# Altium PCB bookmarker.PcbDoc (part 1 of 3)
Units mil, origin at the board's own origin, x right, y up, seen from the top; angles counter-clockwise.
Board outline 5902.76 x 1187.28 mil, 2 copper layers (Top Layer, Bottom Layer); 9 components, 4 nets, 34 pads, 30 vias.
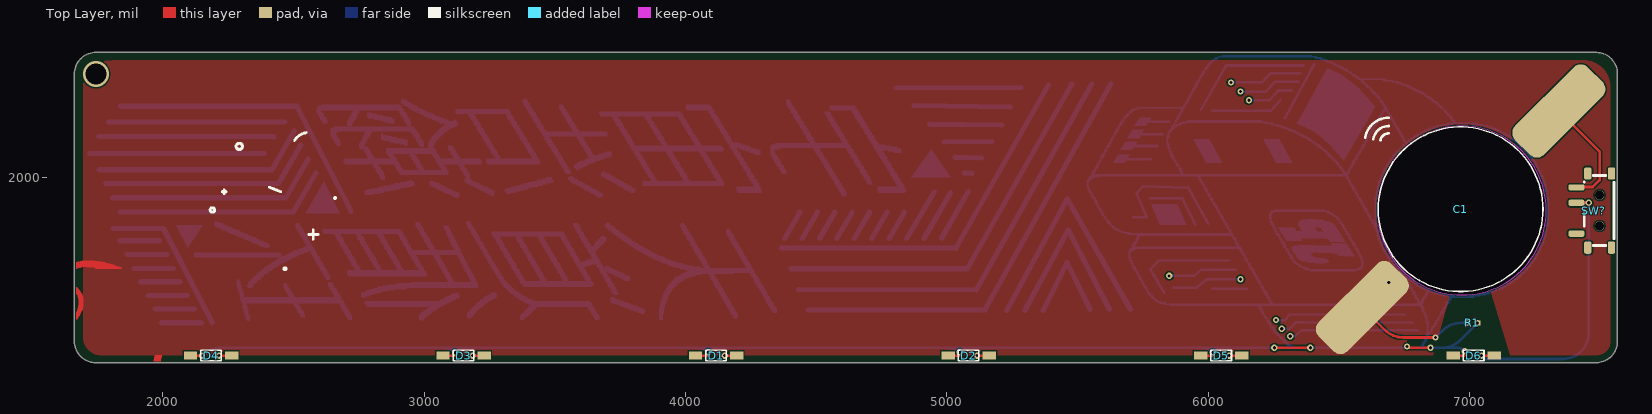
[diagram p0: Top Layer view]
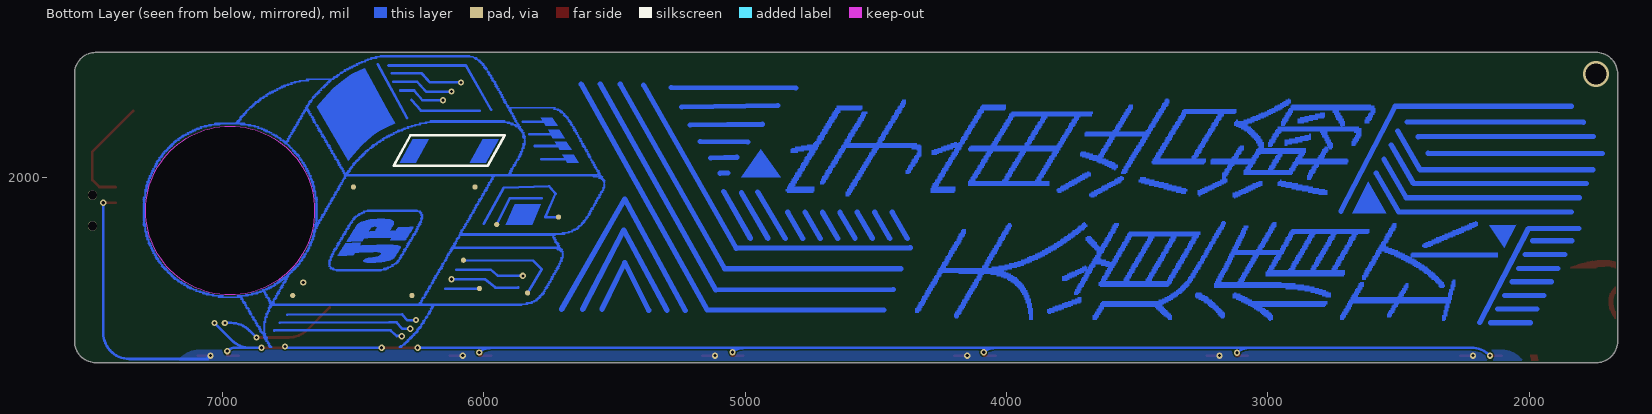
[diagram p1: Bottom Layer view, seen from below]

## Layer stack, top to bottom
Top Solder: solder mask 0.4, Solder Resist, Dk 3.5
Top Layer: signal copper 1.4
Dielectric 1: dielectric 12.6, FR-4, Dk 4.8
Bottom Layer: signal copper 1.4
Bottom Solder: solder mask 0.4, Solder Resist, Dk 3.5

## Board outline
1661.99,1374.09 cw(c1665,1374.26) 1661.98,1374.26 1661.98,2396.95 cw(c1744.9,2396.95) 1744.9,2479.86 cw(c1744.9,2396.95) 1744.9,2479.86 7484,2480.01 cw(c7484,2477) 7484.98,2479.85 cw(c7483.45,2398.56) 7564.73,2400.34 cw(c7561.73,2400) 7564.75,2400 7564.75,1375 cw(c7482.48,1375) 7483.12,1292.74 cw(c7482.48,1375) 7482.48,1292.73 7483,1292.73 ccw(c7483,1295.75) 7483.12,1292.74 7483,1292.73 1744.25,1292.73 cw(c1744.25,1375)
cut-out: 6647,1875 ccw(c6970,1875) 6970,1552 ccw(c6970,1875) 7293,1875 ccw(c6970,1875) 6970,2198 ccw(c6970,1875)

## Design rules (kind name [scope] priority, off if disabled: settings)
Clearance [All] p1: gap=6 ignorepadtopadclearanceinfootprint=FALSE
PlaneClearance [All] p1: clearance=10
PolygonConnect [All] p1: connectstyle=Direct reliefconductorwidth=6 reliefentries=4 polygonreliefangle="90 Angle" airgapwidth=6
RoutingVias [All] p1: holewidth=28 width=50 viastyle="Through Hole" minholewidth=12 minwidth=20 maxholewidth=1000 maxwidth=1000
SolderMaskExpansion [All] p1: expansion=4
Width [All] p1: maxlimit=100 minlimit=1 preferedwidth=10
29 further rules are at their usual default settings.

## Components (designator, comment, footprint, x,y, rotation, side; value= is the part's Value field where it differs from the comment)
C1 "CAP" cr1616 6965,1880 r45 top locked
D1 "LED" led_335 4117,1330 r180 top locked
D2 "LED" led_335 5083,1330 r180 top locked
D3 "LED" led_335 3151,1330 r180 top locked
D4 "LED" led_335 2185,1330 r180 top locked
D5 "LED" led_335 6049,1330 r180 top locked
D6 "LED" led_335 7015,1330 r180 top locked
R1 "RES" 0402 7010,1445 r180 top locked
SW? "MSK12C02" SW-TH_MSK12C02 7475,1875 r90 top

## Footprints (in the part's own frame and the unit in brackets; to place one, negate y for a bottom-side part, rotate by r counter-clockwise, add the part's x,y. Pads: shape width x height; smd on the part's side, far side on the other; paste and mask are expansions set on the pad)
0402 [mm] "Chip Capacitor, Body 1.0x0.5mm, IPC High Density"
  rect 0.6x0.5 smd: 1(-0.5,0) 2(0.5,0)
  body extent -0.55,-0.3 0.55,0.3, height 1.3
cr1616 [mm]
  rrect50% 10x4 smd: 0(-13.5,0) 1(13.5,0)
  silkscreen extent -8,-8 8,8
led_335 [mm]
  rect 1.3x0.8 smd: 0(2,0.25) 1(-2,0.25)
  silkscreen extent -1,-0.25 1,0.75
SW-TH_MSK12C02 [mm]
  rrect50% 0.6x1.524 smd: 1(-2.25,1.7) 2(0.75,1.7) 3(2.25,1.7)
  rrect50% 1.2x0.7 smd: 4(-3.6,-1.7) 4(-3.6,0.6) 4(3.6,-1.7) 4(3.6,0.6)
  round 0.9 hole 0.9 unplated: ""(-1.5,-0.55) ""(1.5,-0.55)
  silkscreen extent -3.4,-1.95 3.4,0.95

## Part data
C1: "无极性电容"
SW?: BOM_JLCPCB Part Class="Extended Part", BOM_Manufacturer="SHOU HAN", BOM_Manufacturer Part=MSK12C02, BOM_Supplier=LCSC, BOM_Supplier Part=C431540, Contributor=LCSC, spicePre=S, spiceSymbolName=MSK12C02

## Free pads (board coordinates)
  round 20 smd far side: 2(5713.4,1850) 2(5831.7,1560) 2(5950,1821.6) 2(6016.1,1576.59) 2(6033,1965) 2(6077.4,1685) 2(6274.3,1550) 2(6498.3,1965) 2(6730.38,1550)

## Via types
v1: diameter 24, hole 12, Top Layer to Bottom Layer, tented both sides, 29 vias
v2: diameter 100, hole 80, Top Layer to Bottom Layer, tented both sides, 1 vias

## Nets (pads, with @x,y where several pads share a name; then routed paths per layer and width w, separated by ;. In a path a pad name is that pad's centre, name@x,y a point inside that pad or via, vN(x,y) a via of type N, cw(c..) or ccw(c..) an arc to the next point about the centre after c; other vN are vias at no path point)
NetC1_0: C1.0 R1.2 | length 2995.1
  Top Layer w2.4: 1670,1460.6 1672.4,1460.6 ; 1670,1463 1674.8,1463 ; 1670,1465.4 1674.8,1465.4 ; 1670,1467.8 1677.2,1467.8 ; 1670,1470.2 1679.6,1470.2 ; 1670,1472.6 1679.6,1472.6 ; 1670,1475 1682,1475 ; 1670,1477.4 1682,1477.4 ; 1670,1479.8 1684.4,1479.8 ; 1670,1482.2 1684.4,1482.2 ; 1670,1484.6 1686.8,1484.6 ; 1670,1487 1686.8,1487 ; 1670,1556.6 1691.6,1556.6 ; 1670,1559 1689.2,1559 ; 1670,1561.4 1686.8,1561.4 ; 1670,1563.8 1686.8,1563.8 ; 1670,1566.2 1684.4,1566.2 ; 1670,1568.6 1682,1568.6 ; 1670,1571 1682,1571 ; 1670,1573.4 1679.6,1573.4 ; 1670,1575.8 1677.2,1575.8 ; 1670,1578.2 1674.8,1578.2 ; 1670,1580.6 1672.4,1580.6 ; 1670,1655 1672.4,1655 ; 1670,1657.4 1686.8,1657.4 ; 1670,1659.8 1689.2,1659.8 ; 1670,1662.2 1828.4,1662.2 ; 1670,1664.6 1821.2,1664.6 ; 1670,1667 1814,1667 ; 1670,1669.4 1806.8,1669.4 ; 1670,1671.8 1799.6,1671.8 ; 1670,1674.2 1679.6,1674.2 ; 1670,1676.6 1780.4,1676.6 ; 1672.4,1489.4 1689.2,1489.4 ; 1672.4,1491.8 1689.2,1491.8 ; 1672.4,1494.2 1691.6,1494.2 ; 1672.4,1554.2 1691.6,1554.2 ; 1674.8,1496.6 1691.6,1496.6 ; 1674.8,1499 1694,1499 ; 1674.8,1501.4 1694,1501.4 ; 1674.8,1547 1694,1547 ; 1674.8,1549.4 1694,1549.4 ; 1674.8,1551.8 1691.6,1551.8 ; 1674.8,1679 1766,1679 ; 1677.2,1503.8 1694,1503.8 ; 1677.2,1506.2 1694,1506.2 ; 1677.2,1508.6 1694,1508.6 ; 1677.2,1511 1696.4,1511 ; 1677.2,1539.8 1696.4,1539.8 ; 1677.2,1542.2 1696.4,1542.2 ; 1677.2,1544.6 1694,1544.6 ; 1679.6,1513.4 1696.4,1513.4 ; 1679.6,1515.8 1696.4,1515.8 ; 1679.6,1518.2 1696.4,1518.2 ; 1679.6,1520.6 1696.4,1520.6 ; 1679.6,1523 1696.4,1523 ; 1679.6,1525.4 1696.4,1525.4 ; 1679.6,1527.8 1696.4,1527.8 ; 1679.6,1530.2 1696.4,1530.2 ; 1679.6,1532.6 1696.4,1532.6 ; 1679.6,1535 1696.4,1535 ; 1679.6,1537.4 1696.4,1537.4 ; 1682,1674.2 1790,1674.2 ; 1684.4,1681.4 1749.2,1681.4 ; 1691.6,1683.8 1739.6,1683.8 ; 1710.8,1659.8 1833.2,1659.8 ; 1737.2,1657.4 1840.4,1657.4 ; 1744.4,1655 1842.8,1655 ; 1756.4,1681.4 1758.8,1681.4 ; 1965.2,1299.8 1991.6,1299.8 ; 1965.2,1302.2 1991.6,1302.2 ; 1965.2,1304.6 1991.6,1304.6 ; 1967.6,1307 1991.6,1307 ; 1967.6,1309.4 1994,1309.4 ; 1967.6,1311.8 1994,1311.8 ; 1967.6,1314.2 1994,1314.2 ; 1970,1316.6 1996.4,1316.6 ; 1970,1319 1996.4,1319 ; 1970,1321.4 1996.4,1321.4
  Top Layer w10: C1.0@6589.18,1504.18 6674.71,1418.64 ccw(c6745.42,1489.35) 6745.42,1389.35 v1(6869.1,1389.35) ; v1(6990,1445) R1.2@6990.31,1445
  Bottom Layer w10: v1(6869.1,1389.35) 6895.46,1415.71 cw(c6966.17,1345) 6966.17,1445 v1(6990,1445)
  other v1: 6690,1600
NetC1_1: C1.1 SW?.3 | length 428.9
  Top Layer w10: C1.1@7340.82,2255.82 7496.66,2099.99 7496.66,1991.66 7470,1965 7409.49,1965 SW?.3@7408.07,1963.58
NetD1_0: D1.0 D2.0 D3.0 D4.0 D5.0 D6.0 R1.1 | length 5549.8
  Top Layer w10: D4.0@2106.26,1320.16 2150,1320.16 v1(2150.16,1320) ; D3.0@3076.26,1320.16 3120,1320.16 3118,1322.16 v1(3118,1331) ; D1.0@4041.26,1320.16 4085,1320.16 4087,1322.16 v1(4087,1333) ; D2.0@5006.26,1320.16 5050,1320.16 5048,1322.16 v1(5048,1332.98) ; D5.0@5971.26,1320.16 6015,1320.16 6017,1322.16 v1(6017,1331.77) ; v1(6252.5,1350) v1(6390,1350) ; v1(6760,1355) 6765,1350 v1(6850,1350) ; D6.0@6936.26,1320.16 6980,1320.16 6981,1321.16 v1(6981,1337.22)
  Bottom Layer w10: v1(2150.16,1320) 2150.87,1320.71 cw(c2221.58,1250) 2221.58,1350 3048.74,1350 ; v1(3118,1331) ccw(c3073.34,1286.34) 3073.34,1349.5 3058.75,1349.5 ccw(c3048.74,1250) 3048.74,1350 ; 4050.37,1348.17 cw(c4050.37,1296.37) v1(4087,1333) ; 5009,1349.13 cw(c5009,1293.98) v1(5048,1332.98) ; 5977.36,1348.19 cw(c5977.36,1292.13) v1(6017,1331.77) ; v1(6252.5,1350) 3048.74,1350 ; v1(6390,1350) v1@6760,1350 ; v1(6850,1350) 6893.26,1350 ; v1(6981,1337.22) ccw(c6950.15,1306.36) 6950.15,1350 6893.26,1350 ; v1(7029.69,1445) 6963.97,1379.29 cw(c6893.26,1450) 6893.26,1350
NetD1_1: D1.1 D2.1 D3.1 D4.1 D5.1 D6.1 SW?.2 | length 1313.3
  Top Layer w10: v1(2215,1320) 2215.16,1320.16 D4.1@2263.74,1320.16 ; v1(3185,1320) 3185.16,1320.16 D3.1@3229.74,1320.16 D3.1@3233.74,1320.16 ; v1(4150,1320) 4150.16,1320.16 D1.1@4195.74,1320.16 D1.1@4198.74,1320.16 ; v1(5115,1320) 5115.16,1320.16 D2.1@5161.74,1320.16 D2.1@5163.74,1320.16 ; v1(6080,1320) 6080.16,1320.16 D5.1@6127.74,1320.16 D5.1@6128.74,1320.16 ; v1(7045,1320) 7045.16,1320.16 D6.1@7093.74,1320.16 ; SW?.2@7408.07,1904.53 7454.53,1904.53 v1(7455,1905)
  Bottom Layer w10: v1(7045,1320) cw(c7045,1309) 7056,1309 7056,1307 7355,1307 ccw(c7355,1407) 7455,1407 v1(7455,1905)
pads on no net: SW?. SW?.1 SW?.4
copper on no net: | length 137041.5
  Bottom Layer w1.6: 6269.5,1807 6328.7,1807 ; 6269.5,1808.6 6327.1,1808.6 ; 6269.5,1810.2 6282.3,1810.2 ; 6271.1,1805.4 6330.3,1805.4 ; 6272.7,1802.2 6331.9,1802.2 ; 6272.7,1803.8 6330.3,1803.8 ; 6274.3,1800.6 6333.5,1800.6 ; 6275.9,1797.4 6335.1,1797.4 ; 6275.9,1799 6333.5,1799 ; 6277.5,1794.2 6434.3,1794.2 ; 6277.5,1795.8 6415.1,1795.8 ; 6279.1,1792.6 6499.9,1792.6 ; 6280.7,1789.4 6503.1,1789.4 ; 6280.7,1791 6501.5,1791 ; 6282.3,1787.8 6503.1,1787.8 ; 6283.9,1784.6 6506.3,1784.6 ; 6283.9,1786.2 6504.7,1786.2 ; 6285.5,1783 6506.3,1783 ; 6287.1,1779.8 6507.9,1779.8 ; 6287.1,1781.4 6507.9,1781.4 ; 6288.7,1776.6 6511.1,1776.6 ; 6288.7,1778.2 6509.5,1778.2 ; 6290.3,1775 6511.1,1775 ; 6291.9,1771.8 6514.3,1771.8 ; 6291.9,1773.4 6512.7,1773.4 ; 6293.5,1770.2 6351.1,1770.2 ; 6295.1,1767 6354.3,1767 ; 6295.1,1768.6 6352.7,1768.6 ; 6296.7,1763.8 6355.9,1763.8 ; 6296.7,1765.4 6354.3,1765.4 ; 6299.9,1762.2 6357.5,1762.2 ; 6317.5,1731.8 6538.3,1731.8 ; 6317.5,1733.4 6538.3,1733.4 ; 6317.5,1735 6536.7,1735 ; 6319.1,1728.6 6541.5,1728.6 ; 6319.1,1730.2 6539.9,1730.2 ; 6319.1,1736.6 6535.1,1736.6 ; 6320.7,1727 6541.5,1727 ; 6322.3,1723.8 6544.7,1723.8 ; 6322.3,1725.4 6543.1,1725.4 ; 6322.3,1738.2 6535.1,1738.2 ; 6323.9,1720.6 6546.3,1720.6 ; 6323.9,1722.2 6544.7,1722.2 ; 6325.5,1719 6546.3,1719 ; 6327.1,1715.8 6405.5,1715.8 ; 6327.1,1717.4 6547.9,1717.4 ; 6328.7,1714.2 6395.9,1714.2 ; 6328.7,1739.8 6466.3,1739.8 ; 6330.3,1711 6391.1,1711 ; 6330.3,1712.6 6392.7,1712.6 ; 6331.9,1709.4 6391.1,1709.4 ; 6333.5,1706.2 6392.7,1706.2 ; 6333.5,1707.8 6391.1,1707.8 ; 6335.1,1703 6394.3,1703 ; 6335.1,1704.6 6394.3,1704.6 ; 6336.7,1701.4 6397.5,1701.4 ; 6338.3,1698.2 6402.3,1698.2 ; 6338.3,1699.8 6399.1,1699.8 ; 6339.9,1696.6 6411.9,1696.6 ; 6341.5,1693.4 6434.3,1693.4 ; 6341.5,1695 6424.7,1695 ; 6341.5,1760.6 6355.9,1760.6 ; 6343.1,1691.8 6440.7,1691.8 ; 6343.1,1823 6479.1,1823 ; 6343.1,1824.6 6477.5,1824.6 ; 6343.1,1826.2 6474.3,1826.2 ; 6343.1,1827.8 6471.1,1827.8 ; 6343.1,1829.4 6467.9,1829.4 ; 6344.7,1821.4 6482.3,1821.4 ; 6344.7,1831 6463.1,1831 ; 6344.7,1832.6 6459.9,1832.6 ; 6346.3,1690.2 6447.1,1690.2 ; 6346.3,1741.4 6408.7,1741.4 ; 6346.3,1818.2 6483.9,1818.2 ; 6346.3,1819.8 6483.9,1819.8 ; 6347.9,1688.6 6451.9,1688.6 ; 6347.9,1815 6487.1,1815 ; 6347.9,1816.6 6485.5,1816.6 ; 6347.9,1834.2 6453.5,1834.2 ; 6349.5,1813.4 6411.9,1813.4 ; 6349.5,1835.8 6448.7,1835.8 ; 6351.1,1810.2 6405.5,1810.2 ; 6351.1,1811.8 6407.1,1811.8 ; 6352.7,1687 6455.1,1687 ; 6352.7,1808.6 6407.1,1808.6 ; 6352.7,1837.4 6442.3,1837.4 ; 6354.3,1805.4 6408.7,1805.4 ; 6354.3,1807 6408.7,1807 ; 6355.9,1685.4 6456.7,1685.4 ; 6355.9,1802.2 6410.3,1802.2 ; 6355.9,1803.8 6410.3,1803.8 ; 6357.5,1800.6 6411.9,1800.6 ; 6357.5,1839 6434.3,1839 ; 6359.1,1797.4 6413.5,1797.4 ; 6359.1,1799 6413.5,1799 ; 6360.7,1683.8 6458.3,1683.8 ; 6365.5,1682.2 6459.9,1682.2 ; 6365.5,1840.6 6424.7,1840.6 ; 6371.9,1680.6 6459.9,1680.6 ; 6378.3,1679 6458.3,1679 ; 6378.3,1842.2 6407.1,1842.2 ; 6386.3,1770.2 6514.3,1770.2 ; 6389.5,1677.4 6455.1,1677.4 ; 6411.9,1675.8 6447.1,1675.8 ; 6419.9,1813.4 6487.1,1813.4 ; 6421.5,1715.8 6549.5,1715.8 ; 6426.3,1811.8 6488.7,1811.8 ; 6431.1,1810.2 6488.7,1810.2 ; 6432.7,1807 6491.9,1807 ; 6432.7,1808.6 6490.3,1808.6 ; 6434.3,1803.8 6493.5,1803.8 ; 6434.3,1805.4 6491.9,1805.4 ; 6435.9,1802.2 6495.1,1802.2 ; 6437.5,1799 6496.7,1799 ; 6437.5,1800.6 6495.1,1800.6 ; 6439.1,1794.2 6499.9,1794.2 ; 6439.1,1797.4 6498.3,1797.4 ; 6440.7,1795.8 6498.3,1795.8 ; 6443.9,1768.6 6515.9,1768.6 ; 6458.3,1767 6515.9,1767 ; 6459.9,1763.8 6519.1,1763.8 ; 6459.9,1765.4 6517.5,1765.4 ; 6461.5,1760.6 6520.7,1760.6 ; 6461.5,1762.2 6519.1,1762.2 ; 6463.1,1759 6522.3,1759 ; 6464.7,1757.4 6522.3,1757.4 ; 6469.5,1749.4 6503.1,1749.4 ; 6471.1,1746.2 6530.3,1746.2 ; 6471.1,1747.8 6528.7,1747.8 ; 6472.7,1743 6531.9,1743 ; 6472.7,1744.6 6530.3,1744.6 ; 6474.3,1739.8 6533.5,1739.8 ; 6474.3,1741.4 6533.5,1741.4 ; 6477.5,1714.2 6549.5,1714.2 ; 6493.5,1711 6552.7,1711 ; 6493.5,1712.6 6551.1,1712.6 ; 6495.1,1707.8 6554.3,1707.8 ; 6495.1,1709.4 6552.7,1709.4 ; 6496.7,1706.2 6554.3,1706.2 ; 6498.3,1703 6557.5,1703 ; 6498.3,1704.6 6555.9,1704.6 ; 6507.9,1755.8 6523.9,1755.8 ; 6523.9,1701.4 6557.5,1701.4